# Altium PCB FPGA_Rack_v1_0.PcbDoc (part 5 of 5)
Units mil, origin at the board's own origin, x right, y up, seen from the top; angles counter-clockwise.
Board outline 6299.21 x 3937.01 mil, 8 copper layers (Top Layer, Top, Internal Plane 2, Vcc 3.3V, Internal Plane 1, Gnd, Mid-Layer 1, SIG1, Mid-Layer 2, SIG3, Mid-Layer 3, SIG2, Mid-Layer 4, SIG4, Bottom Layer, Bottom), stack 74.2 mil thick; 215 components, 379 nets, 1713 pads, 1076 vias.
Unrouted connection lines stored in the file: 1.
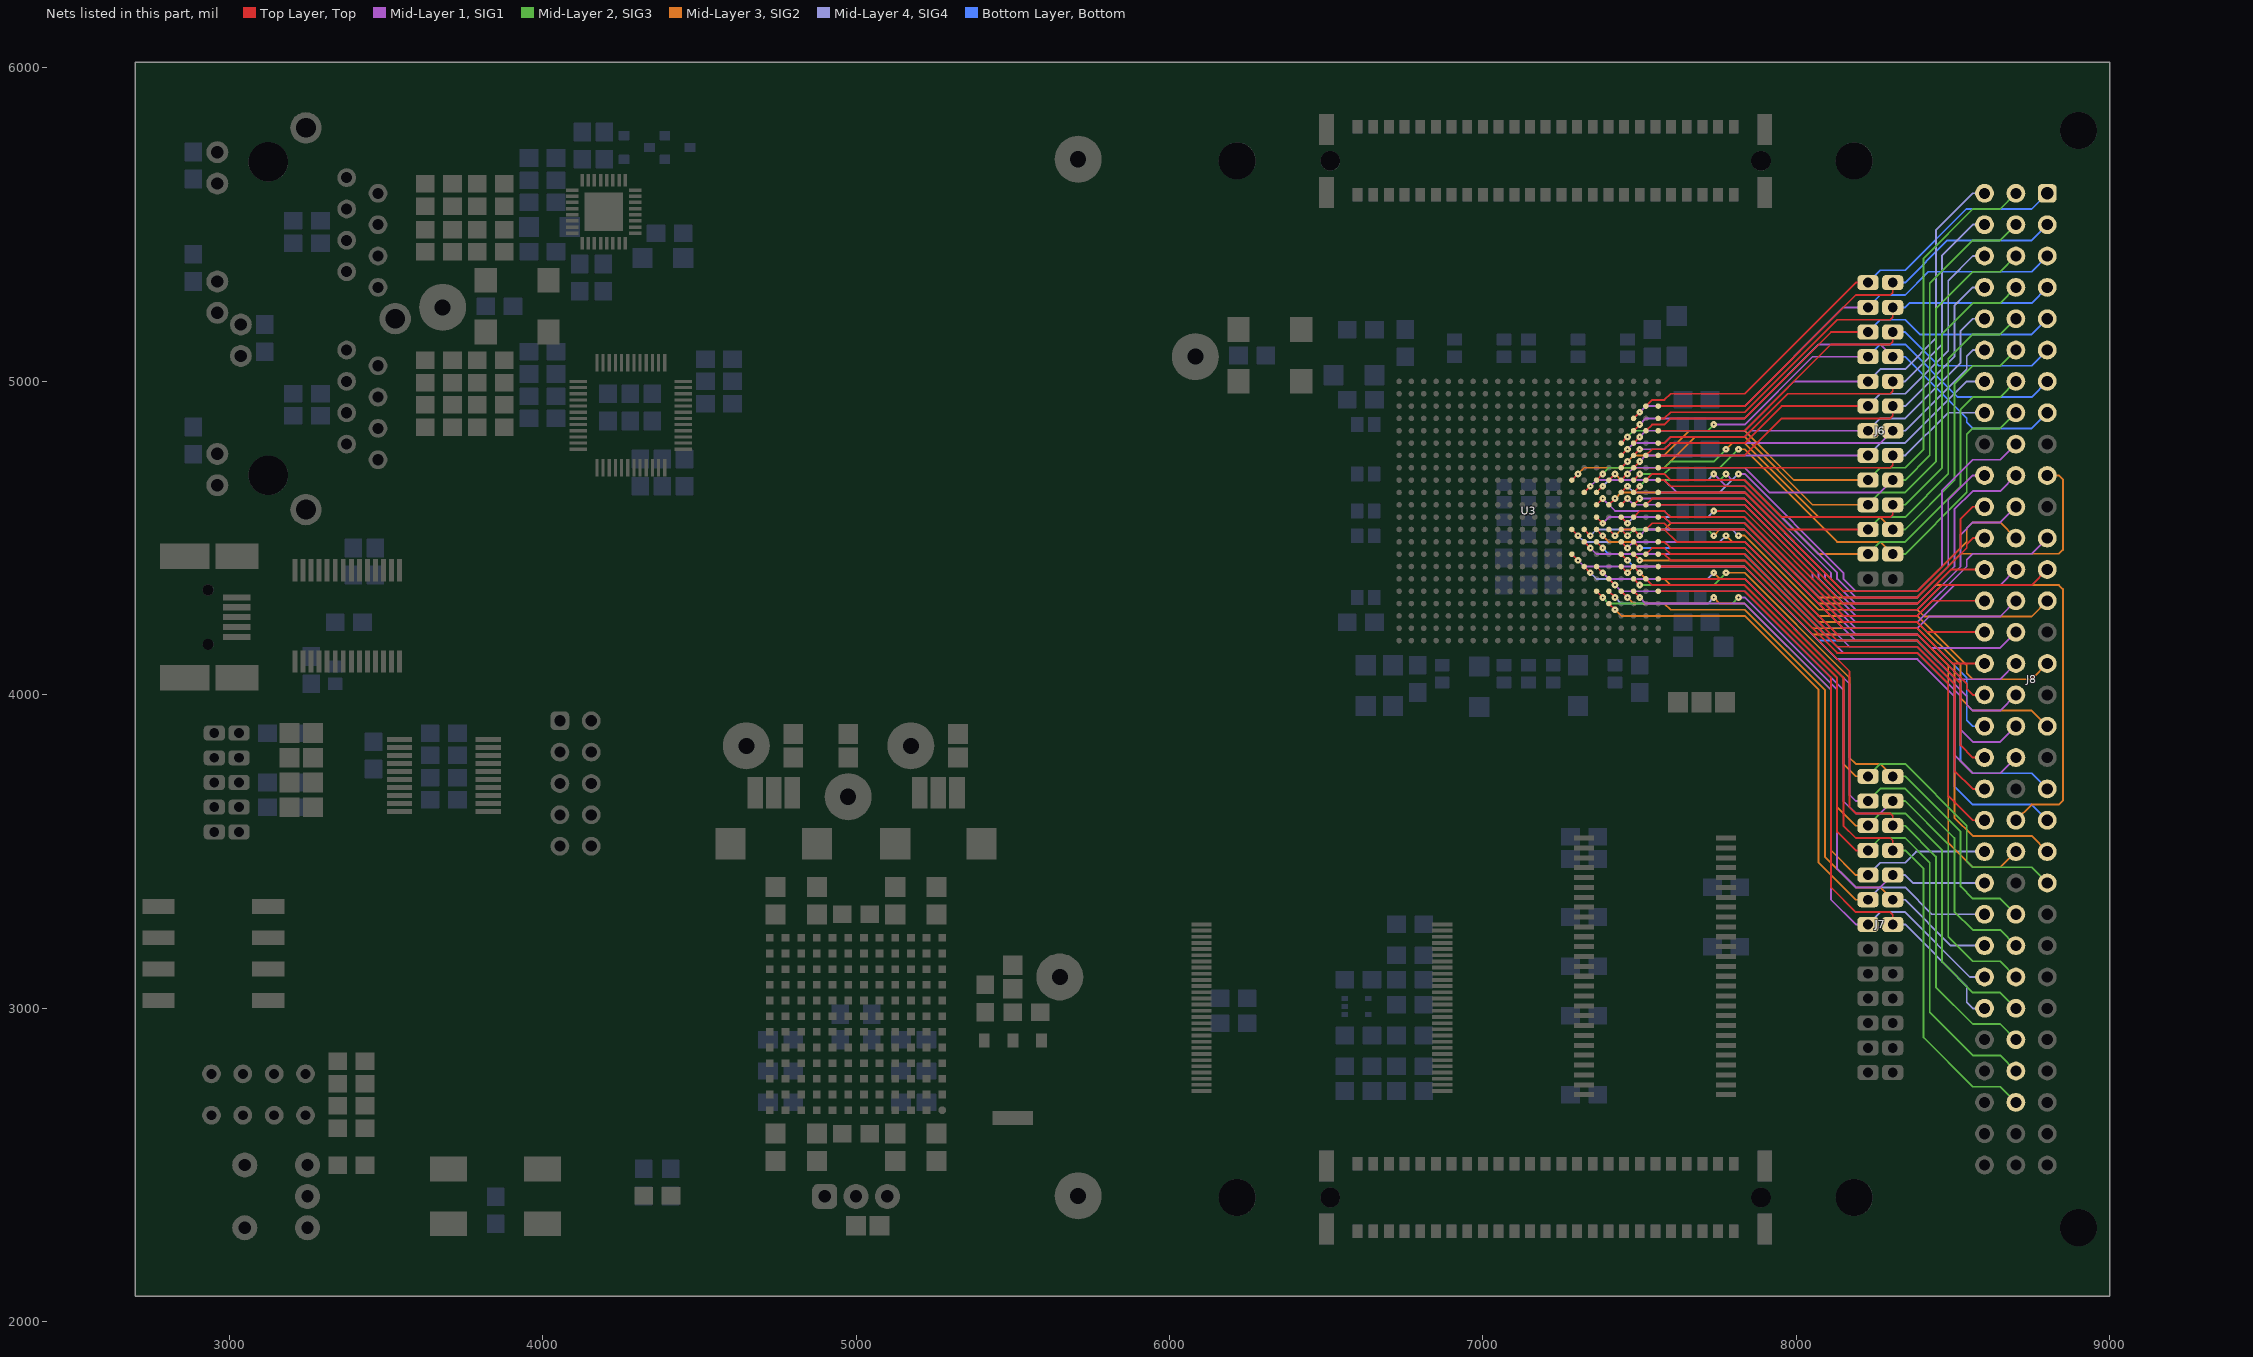
[diagram p11: the nets of this part, all layers, seen from the top]

## Via types
v1: diameter 21.65, hole 5.91, Top Layer, Top to Bottom Layer, Bottom, 1076 vias

## Nets (pads, with @x,y where several pads share a name; then routed paths per layer and width w, separated by ;. In a path a pad name is that pad's centre, name@x,y a point inside that pad or via, vN(x,y) a via of type N, cw(c..) or ccw(c..) an arc to the next point about the centre after c; other vN are vias at no path point) (continued)
VME_A11: J7.14 J8.27c U3.E1 | length 2032.9
  Top Layer, Top w5.91: U3.E1@7559.06,4330.71 7834.65,4330.71 8110.24,4055.12 8110.24,3385.83 8188.98,3307.09 8299.21,3307.09 8307.09,3299.21 J7.14@8307.09,3267.72
  Mid-Layer 4, SIG4 w5.91: J7.14@8307.09,3267.72 8346.46,3267.72 8543.31,3070.87 8543.31,3019.19 8562.5,3000 J8.27c@8600,3000
VME_A12: J7.13 J8.26c U3.E3 | length 2054.1
  Top Layer, Top w5.91: U3.E3@7480.31,4330.71 v1(7500,4311.02)
  Mid-Layer 1, SIG1 w5.91: v1(7500,4311.02) 7519.69,4291.34 7834.65,4291.34 8110.24,4015.75 8110.24,3346.46 8188.98,3267.72 J7.13@8228.35,3267.72
  Mid-Layer 4, SIG4 w5.91: J7.13@8228.35,3267.72 8267.72,3307.09 8346.46,3307.09 8553.54,3100 J8.26c@8600,3100
VME_A13: J7.12 J8.25c U3.E4 | length 1938.8
  Top Layer, Top w5.91: U3.E4@7440.94,4330.71 v1(7460.63,4311.02)
  Mid-Layer 3, SIG2 w5.91: v1(7460.63,4311.02) 7480.31,4291.34 7578.74,4291.34 7598.43,4271.65 7834.65,4271.65 8090.55,4015.75 8090.55,3484.25 8188.98,3385.83 8267.72,3385.83 J7.12@8307.09,3346.46
  Mid-Layer 4, SIG4 w5.91: J7.12@8307.09,3346.46 8346.46,3346.46 8492.91,3200 J8.25c@8600,3200
VME_A14: J7.11 J8.24c U3.D5 | length 1964.5
  Top Layer, Top w5.91: U3.D5@7401.57,4291.34 v1(7421.26,4271.65)
  Mid-Layer 3, SIG2 w5.91: v1(7421.26,4271.65) 7440.94,4251.97 7834.65,4251.97 8070.87,4015.75 8070.87,3464.57 8188.98,3346.46 J7.11@8228.35,3346.46
  Mid-Layer 4, SIG4 w5.91: J7.11@8228.35,3346.46 8267.72,3385.83 8346.46,3385.83 8432.28,3300 J8.24c@8600,3300
VME_A15: J7.10 J8.23c U3.E6 | length 2006.6
  Top Layer, Top w5.91: U3.E6@7362.2,4330.71 v1(7381.89,4311.02)
  Mid-Layer 1, SIG1 w5.91: v1(7814.96,4311.02) 7834.65,4311.02 8129.92,4015.75 8129.92,3444.88 8188.98,3385.83 8267.72,3385.83 J7.10@8307.09,3425.2
  Mid-Layer 2, SIG3 w5.91: v1(7381.89,4311.02) 7401.57,4291.34 7795.28,4291.34 v1(7814.96,4311.02)
  Mid-Layer 4, SIG4 w5.91: J7.10@8307.09,3425.2 8346.46,3425.2 8371.65,3400 J8.23c@8600,3400
VME_A16: J7.9 J8.22c U3.E5 | length 1920.6
  Top Layer, Top w5.91: U3.E5@7401.57,4330.71 v1(7421.26,4311.02)
  Mid-Layer 3, SIG2 w5.91: v1(7736.22,4311.02) 7755.91,4291.34 7834.65,4291.34 8110.24,4015.75 8110.24,3503.94 8188.98,3425.2 J7.9@8228.35,3425.2
  Mid-Layer 4, SIG4 w5.91: v1(7421.26,4311.02) 7440.94,4291.34 7716.54,4291.34 v1(7736.22,4311.02) ; J7.9@8228.35,3425.2 8267.72,3464.57 8346.46,3464.57 8381.89,3500 J8.22c@8600,3500
VME_A17: J8.21c U3.H1 | length 1601.8
  Top Layer, Top w5.91: U3.H1@7559.06,4448.82 7578.74,4448.82 7598.43,4429.13 7834.65,4429.13 8129.92,4133.86 8385.83,4133.86 8484.25,4035.43 8484.25,3678.25 8562.5,3600 J8.21c@8600,3600
VME_A18: J8.20c U3.H2 | length 1569
  Top Layer, Top w5.91: U3.H2@7519.69,4448.82 7539.37,4468.5 7578.74,4468.5 7598.43,4448.82 7834.65,4448.82 8129.92,4153.54 8385.83,4153.54 8503.94,4035.43 8503.94,3758.56 8562.5,3700 J8.20c@8600,3700
VME_A19: J8.19c U3.J1 | length 1441.1
  Top Layer, Top w5.91: U3.J1@7559.06,4488.19 7578.74,4488.19 7598.43,4468.5 7834.65,4468.5 8129.92,4173.23 8385.83,4173.23 8523.62,4035.43 8523.62,3838.88 8562.5,3800 J8.19c@8600,3800
VME_A20: J8.18c U3.J3 | length 1442.9
  Top Layer, Top w5.91: U3.J3@7480.31,4488.19 v1(7500,4468.5)
  Bottom Layer, Bottom w5.91: v1(7500,4468.5) 7834.65,4468.5 8090.55,4212.6 8385.83,4212.6 8543.31,4055.12 8543.31,3919.19 8562.5,3900 J8.18c@8600,3900
VME_A21: J8.17c U3.K1 | length 1269
  Top Layer, Top w5.91: U3.K1@7559.06,4527.56 7578.74,4527.56 7618.11,4488.19 7834.65,4488.19 8129.92,4192.91 8385.83,4192.91 8543.31,4035.43 8543.31,4019.19 8562.5,4000 J8.17c@8600,4000
VME_A22: J8.16c U3.K2 | length 1273.7
  Top Layer, Top w5.91: U3.K2@7519.69,4527.56 7539.37,4547.24 7578.74,4547.24 7598.43,4527.56 7834.65,4527.56 8149.61,4212.6 8385.83,4212.6 8498.43,4100 J8.16c@8600,4100
VME_A23: J8.15c U3.L1 | length 1192.9
  Top Layer, Top w5.91: U3.L1@7559.06,4566.93 7578.74,4566.93 7598.43,4547.24 7834.65,4547.24 8149.61,4232.28 8385.83,4232.28 8418.11,4200 J8.15c@8600,4200
VME_ACFAIL_N: J6.19 J8.3b U3.P8 | length 2178.1
  Top Layer, Top w5.91: U3.P8@7283.46,4685.04 v1(7303.15,4704.72)
  Mid-Layer 2, SIG3 w5.91: J6.19@8228.35,4606.3 8267.72,4645.67 8346.46,4645.67 8444.88,4744.09 8444.88,5232.38 8562.5,5350 8650,5350 J8.3b@8700,5400
  Mid-Layer 3, SIG2 w5.91: v1(7303.15,4704.72) 7322.83,4724.41 7578.74,4724.41 7677.17,4822.83 7834.65,4822.83 8051.18,4606.3 J6.19@8228.35,4606.3
VME_AM0: J8.16b U3.K3 | length 1454.5
  Top Layer, Top w5.91: U3.K3@7480.31,4527.56 v1(7500,4507.87)
  Mid-Layer 1, SIG1 w5.91: v1(7500,4507.87) 7519.69,4527.56 7834.65,4527.56 8188.98,4173.23 8385.83,4173.23 8509.06,4050 8650,4050 J8.16b@8700,4100
VME_AM1: J8.17b U3.J4 | length 1534.7
  Top Layer, Top w5.91: U3.J4@7440.94,4488.19 v1(7460.63,4468.5)
  Mid-Layer 1, SIG1 w5.91: v1(7460.63,4468.5) 7480.31,4488.19 7834.65,4488.19 8169.29,4153.54 8385.83,4153.54 8543.31,3996.06 8543.31,3969.19 8562.5,3950 8650,3950 J8.17b@8700,4000
VME_AM2: J8.18b U3.J7 | length 1725
  Top Layer, Top w5.91: U3.J7@7322.83,4488.19 v1(7342.52,4468.5)
  Mid-Layer 1, SIG1 w5.91: v1(7342.52,4468.5) 7362.2,4448.82 7834.65,4448.82 8149.61,4133.86 8385.83,4133.86 8523.62,3996.06 8523.62,3888.88 8562.5,3850 8650,3850 J8.18b@8700,3900
VME_AM3: J8.19b U3.H8 | length 1836.5
  Top Layer, Top w5.91: U3.H8@7283.46,4448.82 v1(7303.15,4429.13)
  Mid-Layer 1, SIG1 w5.91: v1(7303.15,4429.13) 7322.83,4409.45 7834.65,4409.45 8129.92,4114.17 8385.83,4114.17 8503.94,3996.06 8503.94,3808.56 8562.5,3750 8650,3750 J8.19b@8700,3800
VME_AM4: J7.1 J8.23a U3.G7 | length 2172.1
  Top Layer, Top w5.91: U3.G7@7322.83,4409.45 v1(7342.52,4389.76)
  Mid-Layer 2, SIG3 w5.91: J7.1@8228.35,3740.16 8267.72,3779.53 8346.46,3779.53 8543.31,3582.68 8543.31,3469.19 8562.5,3450 8750,3450 J8.23a@8800,3400
  Mid-Layer 3, SIG2 w5.91: v1(7736.22,4389.76) 7755.91,4370.08 7834.65,4370.08 8149.61,4055.12 8149.61,3779.53 8188.98,3740.16 J7.1@8228.35,3740.16
  Mid-Layer 4, SIG4 w5.91: v1(7342.52,4389.76) 7362.2,4370.08 7716.54,4370.08 v1(7736.22,4389.76)
VME_AM5: J8.14c U3.L3 | length 1286.3
  Top Layer, Top w5.91: U3.L3@7480.31,4566.93 7500,4586.61 7578.74,4586.61 7598.43,4566.93 7834.65,4566.93 8149.61,4251.97 8385.83,4251.97 8433.86,4300 J8.14c@8600,4300
VME_AS_N: J8.18a U3.K6 | length 1759.6
  Top Layer, Top w5.91: U3.K6@7362.2,4527.56 v1(7381.89,4507.87)
  Mid-Layer 3, SIG2 w5.91: v1(7381.89,4507.87) 7401.57,4488.19 7578.74,4488.19 7598.43,4468.5 7834.65,4468.5 8070.87,4232.28 8385.83,4232.28 8523.62,4094.49 8523.62,3988.88 8562.5,3950 8750,3950 J8.18a@8800,3900
VME_BBSY_N: J6.17 J8.1b U3.R4 | length 2109.3
  Top Layer, Top w5.91: U3.R4@7440.94,4724.41 v1(7460.63,4744.09)
  Mid-Layer 2, SIG3 w5.91: J6.17@8228.35,4685.04 8267.72,4724.41 8346.46,4724.41 8405.51,4783.46 8405.51,5393.01 8562.5,5550 8650,5550 J8.1b@8700,5600
  Mid-Layer 3, SIG2 w5.91: v1(7460.63,4744.09) 7480.31,4763.78 7578.74,4763.78 7657.48,4842.52 7834.65,4842.52 7992.13,4685.04 J6.17@8228.35,4685.04
VME_BCLR_N: J6.18 J8.2b U3.P4 | length 1983.4
  Top Layer, Top w5.91: U3.P4@7440.94,4685.04 v1(7460.63,4704.72)
  Mid-Layer 1, SIG1 w5.91: v1(7460.63,4704.72) 7480.31,4724.41 7834.65,4724.41 7913.39,4645.67 8267.72,4645.67 J6.18@8307.09,4685.04
  Mid-Layer 2, SIG3 w5.91: J6.18@8307.09,4685.04 8346.46,4685.04 8425.2,4763.78 8425.2,5312.7 8562.5,5450 8650,5450 J8.2b@8700,5500
VME_BERR_N: J8.11c U3.N1 | length 1337.2
  Top Layer, Top w5.91: U3.N1@7559.06,4645.67 7834.65,4645.67 8149.61,4330.71 8385.83,4330.71 8523.62,4468.5 8523.62,4561.12 8562.5,4600 J8.11c@8600,4600
VME_BG0IN_N: J6.20 J8.4b U3.P2 | length 1818.2
  Top Layer, Top w5.91: U3.P2@7519.69,4685.04 7539.37,4704.72 7578.74,4704.72 7598.43,4685.04 7834.65,4685.04 7952.76,4566.93 8299.21,4566.93 8307.09,4574.8 J6.20@8307.09,4606.3
  Mid-Layer 2, SIG3 w5.91: J6.20@8307.09,4606.3 8346.46,4606.3 8464.57,4724.41 8464.57,5152.07 8562.5,5250 8650,5250 J8.4b@8700,5300
VME_BG0OUT_N: J6.21 J8.5b U3.P1 | length 1699.7
  Top Layer, Top w5.91: U3.P1@7559.06,4685.04 7578.74,4685.04 7598.43,4665.35 7834.65,4665.35 7972.44,4527.56 J6.21@8228.35,4527.56
  Mid-Layer 2, SIG3 w5.91: J6.21@8228.35,4527.56 8267.72,4566.93 8346.46,4566.93 8484.25,4704.72 8484.25,5071.75 8562.5,5150 8650,5150 J8.5b@8700,5200
VME_BG1IN_N: J6.22 J8.6b U3.P6 | length 1917.5
  Top Layer, Top w5.91: U3.P6@7362.2,4685.04 v1(7381.89,4704.72)
  Mid-Layer 2, SIG3 w5.91: v1(7381.89,4704.72) 7401.57,4724.41 7578.74,4724.41 7598.43,4744.09 7736.22,4744.09 v1(7775.59,4783.46) ; J6.22@8307.09,4527.56 8346.46,4527.56 8503.94,4685.04 8503.94,4991.44 8562.5,5050 8650,5050 J8.6b@8700,5100
  Mid-Layer 3, SIG2 w5.91: v1(7775.59,4783.46) 7795.28,4803.15 7834.65,4803.15 8070.87,4566.93 8267.72,4566.93 J6.22@8307.09,4527.56
VME_BG1OUT_N: J6.23 J8.7b U3.P5 | length 1784.9
  Top Layer, Top w5.91: U3.P5@7401.57,4685.04 v1(7421.26,4704.72)
  Mid-Layer 2, SIG3 w5.91: J6.23@8228.35,4448.82 8267.72,4488.19 8346.46,4488.19 8523.62,4665.35 8523.62,4911.12 8562.5,4950 8650,4950 J8.7b@8700,5000
  Mid-Layer 3, SIG2 w5.91: v1(7421.26,4704.72) 7440.94,4685.04 7834.65,4685.04 8070.87,4448.82 J6.23@8228.35,4448.82
VME_BG2IN_N: J6.24 J8.8b U3.P3 | length 1694.4
  Top Layer, Top w5.91: U3.P3@7480.31,4685.04 v1(7500,4704.72)
  Mid-Layer 2, SIG3 w5.91: v1(7500,4704.72) 7578.74,4704.72 7598.43,4724.41 7755.91,4724.41 v1(7814.96,4783.46) ; J6.24@8307.09,4448.82 8346.46,4448.82 8543.31,4645.67 8543.31,4830.81 8562.5,4850 8650,4850 J8.8b@8700,4900
  Mid-Layer 3, SIG2 w5.91: v1(7814.96,4783.46) 7834.65,4783.46 8129.92,4488.19 8267.72,4488.19 J6.24@8307.09,4448.82
VME_BG2OUT_N: J8.9b U3.N4 | length 1802.8
  Top Layer, Top w5.91: U3.N4@7440.94,4645.67 v1(7460.63,4665.35)
  Mid-Layer 1, SIG1 w5.91: v1(7814.96,4704.72) 7834.65,4704.72 8149.61,4389.76 8149.61,4370.08 8188.98,4330.71 8385.83,4330.71 8464.57,4409.45 8464.57,4652.07 8562.5,4750 8650,4750 J8.9b@8700,4800
  Mid-Layer 4, SIG4 w5.91: v1(7460.63,4665.35) 7480.31,4645.67 7755.91,4645.67 v1(7814.96,4704.72)
VME_BG3IN_N: J8.10b U3.N6 | length 1820.9
  Top Layer, Top w5.91: U3.N6@7362.2,4645.67 v1(7381.89,4665.35)
  Mid-Layer 1, SIG1 w5.91: v1(7736.22,4704.72) 7775.59,4665.35 7834.65,4665.35 8110.24,4389.76 8110.24,4370.08 8188.98,4291.34 8385.83,4291.34 8503.94,4409.45 8503.94,4591.44 8562.5,4650 8650,4650 J8.10b@8700,4700
  Mid-Layer 4, SIG4 w5.91: v1(7381.89,4665.35) 7401.57,4685.04 7716.54,4685.04 v1(7736.22,4704.72)
VME_BG3OUT_N: J8.11b U3.N7 | length 1771.8
  Top Layer, Top w5.91: U3.N7@7322.83,4645.67 v1(7342.52,4665.35)
  Mid-Layer 1, SIG1 w5.91: v1(7342.52,4665.35) 7362.2,4685.04 7578.74,4685.04 7618.11,4645.67 7834.65,4645.67 8090.55,4389.76 8090.55,4370.08 8188.98,4271.65 8385.83,4271.65 8523.62,4409.45 8523.62,4511.12 8562.5,4550 8650,4550 J8.11b@8700,4600
VME_BR0_N: J8.12b U3.M5 | length 1581.7
  Top Layer, Top w5.91: U3.M5@7401.57,4606.3 v1(7421.26,4625.98)
  Mid-Layer 3, SIG2 w5.91: v1(7421.26,4625.98) 7440.94,4645.67 7834.65,4645.67 8149.61,4330.71 8385.83,4330.71 8543.31,4488.19 8543.31,4530.81 8562.5,4550 8650,4550 J8.12b@8700,4500
VME_BR1_N: J8.13b U3.M4 | length 1511.3
  Top Layer, Top w5.91: U3.M4@7440.94,4606.3 v1(7460.63,4625.98)
  Mid-Layer 1, SIG1 w5.91: v1(7460.63,4625.98) 7480.31,4606.3 7834.65,4606.3 8051.18,4389.76 8051.18,4370.08 8188.98,4232.28 8385.83,4232.28 8503.54,4350 8650,4350 J8.13b@8700,4400
VME_BR2_N: J8.14b U3.M6 | length 1553.4
  Top Layer, Top w5.91: U3.M6@7362.2,4606.3 v1(7381.89,4625.98)
  Mid-Layer 1, SIG1 w5.91: v1(7381.89,4625.98) 7421.26,4586.61 7578.74,4586.61 7598.43,4566.93 7834.65,4566.93 8188.98,4212.6 8385.83,4212.6 8423.23,4250 8650,4250 J8.14b@8700,4300
VME_BR3_N: J8.15b U3.L6 | length 1547.5
  Top Layer, Top w5.91: U3.L6@7362.2,4566.93 v1(7381.89,4547.24)
  Mid-Layer 1, SIG1 w5.91: v1(7381.89,4547.24) 7401.57,4566.93 7578.74,4566.93 7598.43,4547.24 7834.65,4547.24 8188.98,4192.91 8385.83,4192.91 8428.74,4150 8650,4150 J8.15b@8700,4200
VME_D00: J6.1 J8.1a U3.Y2 | length 1561.5
  Top Layer, Top w5.91: U3.Y2@7519.69,4921.26 7539.37,4940.94 7578.74,4940.94 7598.43,4960.63 7834.65,4960.63 8188.98,5314.96 J6.1@8228.35,5314.96
  Bottom Layer, Bottom w5.91: J6.1@8228.35,5314.96 8267.72,5354.33 8346.46,5354.33 8542.13,5550 8750,5550 J8.1a@8800,5600
VME_D01: J6.2 J8.2a U3.Y1 | length 1499.1
  Top Layer, Top w5.91: U3.Y1@7559.06,4921.26 7834.65,4921.26 8188.98,5275.59 8299.21,5275.59 8307.09,5283.46 J6.2@8307.09,5314.96
  Bottom Layer, Bottom w5.91: J6.2@8307.09,5314.96 8346.46,5314.96 8481.5,5450 8750,5450 J8.2a@8800,5500
VME_D02: J6.3 J8.3a U3.W3 | length 1534.3
  Top Layer, Top w5.91: U3.W3@7480.31,4881.89 v1(7500,4901.57)
  Mid-Layer 1, SIG1 w5.91: v1(7500,4901.57) 7519.69,4921.26 7834.65,4921.26 8149.61,5236.22 J6.3@8228.35,5236.22
  Bottom Layer, Bottom w5.91: J6.3@8228.35,5236.22 8267.72,5275.59 8346.46,5275.59 8420.87,5350 8750,5350 J8.3a@8800,5400
VME_D03: J6.4 J8.4a U3.W1 | length 1432.6
  Top Layer, Top w5.91: U3.W1@7559.06,4881.89 7578.74,4881.89 7598.43,4901.57 7834.65,4901.57 8129.92,5196.85 8299.21,5196.85 8307.09,5204.72 J6.4@8307.09,5236.22
  Bottom Layer, Bottom w5.91: J6.4@8307.09,5236.22 8346.46,5236.22 8360.24,5250 8750,5250 J8.4a@8800,5300
VME_D04: J6.5 J8.5a U3.V2 | length 1467.2
  Top Layer, Top w5.91: U3.V2@7519.69,4842.52 7539.37,4862.2 7578.74,4862.2 7598.43,4881.89 7834.65,4881.89 8110.24,5157.48 J6.5@8228.35,5157.48
  Bottom Layer, Bottom w5.91: J6.5@8228.35,5157.48 8267.72,5196.85 8346.46,5196.85 8393.31,5150 8750,5150 J8.5a@8800,5200
VME_D05: J6.6 J8.6a U3.V1 | length 1455.1
  Top Layer, Top w5.91: U3.V1@7559.06,4842.52 7834.65,4842.52 8110.24,5118.11 8299.21,5118.11 8307.09,5125.98 J6.6@8307.09,5157.48
  Bottom Layer, Bottom w5.91: J6.6@8307.09,5157.48 8346.46,5157.48 8453.94,5050 8750,5050 J8.6a@8800,5100
VME_D06: J6.7 J8.7a U3.U4 | length 1579.9
  Top Layer, Top w5.91: U3.U4@7440.94,4803.15 v1(7460.63,4822.83)
  Mid-Layer 1, SIG1 w5.91: v1(7736.22,4862.2) 7834.65,4862.2 8051.18,5078.74 J6.7@8228.35,5078.74
  Mid-Layer 2, SIG3 w5.91: v1(7460.63,4822.83) 7480.31,4842.52 7716.54,4842.52 v1(7736.22,4862.2)
  Bottom Layer, Bottom w5.91: J6.7@8228.35,5078.74 8267.72,5118.11 8346.46,5118.11 8514.57,4950 8750,4950 J8.7a@8800,5000
VME_D07: J6.8 J8.8a U3.V3 | length 1573
  Top Layer, Top w5.91: U3.V3@7480.31,4842.52 v1(7500,4862.2)
  Mid-Layer 1, SIG1 w5.91: v1(7500,4862.2) 7519.69,4881.89 7834.65,4881.89 8070.87,5118.11 8267.72,5118.11 J6.8@8307.09,5078.74
  Bottom Layer, Bottom w5.91: J6.8@8307.09,5078.74 8346.46,5078.74 8543.31,4881.89 8543.31,4869.19 8562.5,4850 8750,4850 J8.8a@8800,4900
VME_D08: J6.9 J8.1c U3.U3 | length 1651.6
  Top Layer, Top w5.91: U3.U3@7480.31,4803.15 v1(7500,4822.83)
  Mid-Layer 1, SIG1 w5.91: v1(7500,4822.83) 7519.69,4842.52 7834.65,4842.52 7992.13,5000 J6.9@8228.35,5000
  Mid-Layer 4, SIG4 w5.91: J6.9@8228.35,5000 8267.72,5039.37 8346.46,5039.37 8444.88,5137.8 8444.88,5482.38 8562.5,5600 J8.1c@8600,5600
VME_D09: J6.10 J8.2c U3.U1 | length 1514.4
  Top Layer, Top w5.91: U3.U1@7559.06,4803.15 7578.74,4803.15 7598.43,4822.83 7834.65,4822.83 7972.44,4960.63 8299.21,4960.63 8307.09,4968.5 J6.10@8307.09,5000
  Mid-Layer 4, SIG4 w5.91: J6.10@8307.09,5000 8346.46,5000 8464.57,5118.11 8464.57,5402.07 8562.5,5500 J8.2c@8600,5500
VME_D10: J6.11 J8.3c U3.T2 | length 1474.7
  Top Layer, Top w5.91: U3.T2@7519.69,4763.78 7539.37,4783.46 7578.74,4783.46 7598.43,4803.15 7834.65,4803.15 7952.76,4921.26 J6.11@8228.35,4921.26
  Mid-Layer 4, SIG4 w5.91: J6.11@8228.35,4921.26 8267.72,4960.63 8346.46,4960.63 8484.25,5098.43 8484.25,5321.75 8562.5,5400 J8.3c@8600,5400
VME_D11: J6.12 J8.4c U3.T1 | length 1376.8
  Top Layer, Top w5.91: U3.T1@7559.06,4763.78 7834.65,4763.78 7952.76,4881.89 8299.21,4881.89 8307.09,4889.76 J6.12@8307.09,4921.26
  Mid-Layer 4, SIG4 w5.91: J6.12@8307.09,4921.26 8346.46,4921.26 8503.94,5078.74 8503.94,5241.44 8562.5,5300 J8.4c@8600,5300
VME_D12: J6.13 J8.5c U3.T4 | length 1399.5
  Top Layer, Top w5.91: U3.T4@7440.94,4763.78 v1(7460.63,4783.46)
  Mid-Layer 1, SIG1 w5.91: v1(7460.63,4783.46) 7480.31,4803.15 7578.74,4803.15 7598.43,4822.83 7834.65,4822.83 7854.33,4842.52 J6.13@8228.35,4842.52
  Mid-Layer 4, SIG4 w5.91: J6.13@8228.35,4842.52 8267.72,4881.89 8346.46,4881.89 8523.62,5059.06 8523.62,5161.12 8562.5,5200 J8.5c@8600,5200
VME_D13: J6.14 J8.6c U3.T3 | length 1283.2
  Top Layer, Top w5.91: U3.T3@7480.31,4763.78 v1(7500,4783.46)
  Mid-Layer 1, SIG1 w5.91: v1(7500,4783.46) 7578.74,4783.46 7598.43,4803.15 8267.72,4803.15 J6.14@8307.09,4842.52
  Mid-Layer 4, SIG4 w5.91: J6.14@8307.09,4842.52 8346.46,4842.52 8543.31,5039.37 8543.31,5080.81 8562.5,5100 J8.6c@8600,5100
VME_D14: J6.15 J8.7c U3.R3 | length 1233.8
  Top Layer, Top w5.91: U3.R3@7480.31,4724.41 v1(7500,4744.09)
  Mid-Layer 1, SIG1 w5.91: v1(7500,4744.09) 7519.69,4763.78 J6.15@8228.35,4763.78
  Mid-Layer 4, SIG4 w5.91: J6.15@8228.35,4763.78 8267.72,4803.15 8345.96,4803.15 8542.82,5000 J8.7c@8600,5000
VME_D15: J6.16 J8.8c U3.R1 | length 1132.1
  Top Layer, Top w5.91: U3.R1@7559.06,4724.41 8299.21,4724.41 8307.09,4732.28 J6.16@8307.09,4763.78
  Mid-Layer 4, SIG4 w5.91: J6.16@8307.09,4763.78 8347.54,4763.78 8483.76,4900 J8.8c@8600,4900
VME_DS0: J8.13a U3.L4 | length 1567.1
  Top Layer, Top w5.91: U3.L4@7440.94,4566.93 v1(7460.63,4547.24) ; v1(7736.22,4586.61) 7834.65,4586.61 8149.61,4271.65 8385.83,4271.65 8464.17,4350 8750,4350 J8.13a@8800,4400
  Mid-Layer 4, SIG4 w5.91: v1(7460.63,4547.24) 7480.31,4566.93 7716.54,4566.93 v1(7736.22,4586.61)
VME_DS1: J8.12a U3.M3 | length 1609.5
  Top Layer, Top w5.91: U3.M3@7480.31,4606.3 v1(7500,4625.98)
  Mid-Layer 1, SIG1 w5.91: v1(7500,4625.98) 7834.65,4625.98 8070.87,4389.76 8070.87,4370.08 8188.98,4251.97 8385.83,4251.97 8543.31,4409.45 8543.31,4430.81 8562.5,4450 8750,4450 J8.12a@8800,4500
VME_DTACK_N: J8.16a U3.K8 | length 1766.2
  Top Layer, Top w5.91: U3.K8@7283.46,4527.56 v1(7303.15,4507.87)
  Mid-Layer 3, SIG2 w5.91: v1(7775.59,4507.87) 7795.28,4488.19 7834.65,4488.19 8070.87,4251.97 8385.83,4251.97 8543.31,4094.49 8543.31,4069.19 8562.5,4050 8750,4050 J8.16a@8800,4100
  Mid-Layer 4, SIG4 w5.91: v1(7303.15,4507.87) 7322.83,4488.19 7755.91,4488.19 v1(7775.59,4507.87)
VME_IACK_N: J8.20a U3.J6 | length 1920.2
  Top Layer, Top w5.91: U3.J6@7362.2,4488.19 v1(7381.89,4468.5)
  Bottom Layer, Bottom w5.91: v1(7381.89,4468.5) 7401.57,4448.82 7834.65,4448.82 8090.55,4192.91 8385.83,4192.91 8523.62,4055.12 8523.62,3788.88 8562.5,3750 8750,3750 J8.20a@8800,3700
VME_IACKIN_N: J8.21a U3.H4 | length 1913.7
  Top Layer, Top w5.91: U3.H4@7440.94,4448.82 v1(7460.63,4429.13)
  Bottom Layer, Bottom w5.91: v1(7460.63,4429.13) 7480.31,4409.45 7834.65,4409.45 8070.87,4173.23 8385.83,4173.23 8503.94,4055.12 8503.94,3708.56 8562.5,3650 8750,3650 J8.21a@8800,3600
VME_IACKOUT_N: J8.22a U3.H3 | length 1997.3
  Top Layer, Top w5.91: U3.H3@7480.31,4448.82 v1(7500,4429.13)
  Mid-Layer 3, SIG2 w5.91: v1(7500,4429.13) 7834.65,4429.13 8051.18,4212.6 8385.83,4212.6 8503.94,4094.49 8503.94,3608.56 8562.5,3550 8750,3550 J8.22a@8800,3500
VME_IRQ1_N: J7.8 J8.30b U3.F1 | length 2443
  Top Layer, Top w5.91: U3.F1@7559.06,4370.08 7834.65,4370.08 8149.61,4055.12 8149.61,3582.68 8188.98,3543.31 8299.21,3543.31 8307.09,3535.43 J7.8@8307.09,3503.94
  Mid-Layer 2, SIG3 w5.91: J7.8@8307.09,3503.94 8346.46,3503.94 8405.51,3444.88 8405.51,2906.99 8562.5,2750 8650,2750 J8.30b@8700,2700
VME_IRQ2_N: J7.7 J8.29b U3.F2 | length 2431.1
  Top Layer, Top w5.91: U3.F2@7519.69,4370.08 7539.37,4350.39 7834.65,4350.39 8129.92,4055.12 8129.92,3562.99 8188.98,3503.94 J7.7@8228.35,3503.94
  Mid-Layer 2, SIG3 w5.91: J7.7@8228.35,3503.94 8267.72,3543.31 8346.46,3543.31 8425.2,3464.57 8425.2,2987.3 8562.5,2850 8650,2850 J8.29b@8700,2800
VME_IRQ3_N: J7.6 J8.28b U3.G1 | length 2282.4
  Top Layer, Top w5.91: U3.G1@7559.06,4409.45 7834.65,4409.45 8169.29,4074.8 8169.29,3641.73 8188.98,3622.05 8299.21,3622.05 8307.09,3614.17 J7.6@8307.09,3582.68
  Mid-Layer 2, SIG3 w5.91: J7.6@8307.09,3582.68 8346.46,3582.68 8444.88,3484.25 8444.88,3067.62 8562.5,2950 8650,2950 J8.28b@8700,2900
VME_IRQ4_N: J7.5 J8.27b U3.G3 | length 2286.8
  Top Layer, Top w5.91: U3.G3@7480.31,4409.45 v1(7500,4389.76)
  Mid-Layer 2, SIG3 w5.91: J7.5@8228.35,3582.68 8267.72,3622.05 8346.46,3622.05 8464.57,3503.94 8464.57,3147.93 8562.5,3050 8650,3050 J8.27b@8700,3000
  Mid-Layer 3, SIG2 w5.91: v1(7500,4389.76) 7519.69,4370.08 7578.74,4370.08 7598.43,4350.39 7834.65,4350.39 8129.92,4055.12 8129.92,3641.73 8188.98,3582.68 J7.5@8228.35,3582.68
VME_IRQ5_N: J7.4 J8.26b U3.F5 | length 2237.7
  Top Layer, Top w5.91: U3.F5@7401.57,4370.08 v1(7421.26,4350.39)
  Mid-Layer 1, SIG1 w5.91: v1(7421.26,4350.39) 7440.94,4330.71 7834.65,4330.71 8149.61,4015.75 8149.61,3661.42 8188.98,3622.05 8267.72,3622.05 J7.4@8307.09,3661.42
  Mid-Layer 2, SIG3 w5.91: J7.4@8307.09,3661.42 8346.46,3661.42 8484.25,3523.62 8484.25,3228.25 8562.5,3150 8650,3150 J8.26b@8700,3100
VME_IRQ6_N: J7.3 J8.25b U3.G6 | length 2216.5
  Top Layer, Top w5.91: U3.G6@7362.2,4409.45 v1(7381.89,4389.76)
  Mid-Layer 1, SIG1 w5.91: v1(7381.89,4389.76) 7401.57,4370.08 7834.65,4370.08 8169.29,4035.43 8169.29,3681.1 8188.98,3661.42 J7.3@8228.35,3661.42
  Mid-Layer 2, SIG3 w5.91: J7.3@8228.35,3661.42 8267.72,3700.79 8346.46,3700.79 8503.94,3543.31 8503.94,3308.56 8562.5,3250 8650,3250 J8.25b@8700,3200
VME_IRQ7_N: J7.2 J8.24b U3.F3 | length 1947.4
  Top Layer, Top w5.91: U3.F3@7480.31,4370.08 v1(7500,4350.39)
  Mid-Layer 2, SIG3 w5.91: v1(7500,4350.39) 7736.22,4350.39 v1(7775.59,4389.76) ; J7.2@8307.09,3740.16 8346.46,3740.16 8523.62,3562.99 8523.62,3388.88 8562.5,3350 8650,3350 J8.24b@8700,3300
  Mid-Layer 3, SIG2 w5.91: v1(7775.59,4389.76) 7834.65,4389.76 8169.29,4055.12 8169.29,3799.21 8188.98,3779.53 8267.72,3779.53 J7.2@8307.09,3740.16
VME_LWORD_N: J8.13c U3.M1 | length 1216.4
  Top Layer, Top w5.91: U3.M1@7559.06,4606.3 7834.65,4606.3 8149.61,4291.34 8385.83,4291.34 8494.49,4400 J8.13c@8600,4400
VME_SERCLK: J8.21b U3.K4 | length 2419.9
  Top Layer, Top w5.91: U3.K4@7440.94,4527.56 v1(7460.63,4507.87)
  Mid-Layer 2, SIG3 w5.91: v1(7460.63,4507.87) 7480.31,4527.56 7716.54,4527.56 v1(7736.22,4507.87)
  Mid-Layer 3, SIG2 w5.91: v1(7736.22,4507.87) 7755.91,4527.56 7834.65,4527.56 8070.87,4291.34 8385.83,4291.34 8444.49,4350 8837.5,4350 8850,4337.5 8850,3662.5 8837.5,3650 8750,3650 J8.21b@8700,3600
VME_SERDAT: J8.22b U3.G4 | length 2025.2
  Top Layer, Top w5.91: U3.G4@7440.94,4409.45 v1(7460.63,4389.76)
  Mid-Layer 3, SIG2 w5.91: v1(7460.63,4389.76) 7480.31,4409.45 7834.65,4409.45 8051.18,4192.91 8385.83,4192.91 8484.25,4094.49 8484.25,3528.25 8562.5,3450 8650,3450 J8.22b@8700,3500
VME_SYSCLK: J8.10a U3.K5 | length 1913.7
  Top Layer, Top w5.91: U3.K5@7401.57,4527.56 v1(7421.26,4507.87)
  Mid-Layer 3, SIG2 w5.91: v1(7421.26,4507.87) 7440.94,4527.56 7578.74,4527.56 7598.43,4547.24 7834.65,4547.24 8070.87,4311.02 8385.83,4311.02 8524.8,4450 8837.5,4450 8850,4462.5 8850,4687.5 8837.5,4700 J8.10a@8800,4700
VME_SYSFAIL_N: J8.10c U3.N3 | length 1604.2
  Top Layer, Top w5.91: U3.N3@7480.31,4645.67 v1(7500,4665.35)
  Mid-Layer 1, SIG1 w5.91: v1(7775.59,4704.72) 7795.28,4685.04 7834.65,4685.04 8129.92,4389.76 8129.92,4370.08 8188.98,4311.02 8385.83,4311.02 8484.25,4409.45 8484.25,4621.75 8562.5,4700 J8.10c@8600,4700
  Mid-Layer 2, SIG3 w5.91: v1(7500,4665.35) 7519.69,4685.04 7755.91,4685.04 v1(7775.59,4704.72)
VME_SYSRESET_N: J8.12c U3.M2 | length 1304.4
  Top Layer, Top w5.91: U3.M2@7519.69,4606.3 7539.37,4625.98 7834.65,4625.98 8149.61,4311.02 8385.83,4311.02 8543.31,4468.5 8543.31,4480.81 8562.5,4500 J8.12c@8600,4500
VME_WRITE_N: J8.14a U3.K7 | length 1629.2
  Top Layer, Top w5.91: U3.K7@7322.83,4527.56 v1(7342.52,4507.87)
  Mid-Layer 3, SIG2 w5.91: v1(7814.96,4507.87) 7834.65,4507.87 8070.87,4271.65 8385.83,4271.65 8407.48,4250 8750,4250 J8.14a@8800,4300
  Mid-Layer 4, SIG4 w5.91: v1(7342.52,4507.87) 7362.2,4527.56 7795.28,4527.56 v1(7814.96,4507.87)
pads on no net: 1.1 2.1 3.1 4.1 D1.2 D2.2 J2.51 J2.52 J2.53 J2.54 J2.55 J2.56 J3.51 J3.52 J3.53 J3.54 J3.55 J3.56 J4.51 J4.52 J4.53 J4.54 J4.55 J4.56 J5.51 J5.52 J5.53 J5.54 J5.55 J5.56 J8.97 J8.98 J9.7 J9.19 J9.28 J9.29 J10.4 J10.10 J10.11 J11.8 J11.10 S1.4 S1.5 S1.NC U1.53 U1.55 U1.125 U3.AB5 U3.B22 U3.C19 U3.D1 U3.D10 U3.D12 U3.D13 U3.E8 U3.E10 U3.E12 U3.E14 U3.F8 U3.F9 U3.F10 U3.F12 U3.F13 U3.F14 U3.F15 U3.G8 U3.G9 U3.G11 U3.G13 U3.H5 U3.H6 U3.H10 U3.H11 U3.H12 U3.H13 U3.H14 U3.M7 U3.M8 U3.N22 U3.P7 U3.P21 U3.T5 U3.T10 U3.T12 U3.T20 U3.U8 U3.U10 U3.U12 U3.W6 U3.W15 U3.Y5 U3.Y6 U3.Y16 U3.Y20 U7.40 U9.8 U10.8 U10.9 U10.10 U10.11 U10.12 U10.26 U10.33 U11.8 U11.19 U11.24 U11.27 U11.28 U12.1 U12.11

## Polygon pours and split planes (outlines as drawn)
5.0V on Top Layer, Top (solid, pour order 44): 4962.5,2375 4975,2362.5 4975,2275 5025,2275 5025,2362.5 5037.5,2375 5037.5,2481.25 5112.5,2481.25 5112.5,2543.75 4887.5,2543.75 4887.5,2481.25 4962.5,2481.25
GND on Top Layer, Top (solid, pour order 42): 5212.5,2481.25 5287.5,2481.25 5287.5,3475 5450,3475 5450,3575 5337.5,3575 5287.5,3625 5287.5,3737.5 5237.5,3737.5 5237.5,3600 5212.5,3575 5212.5,3037.5 5087.5,3037.5 5087.5,3137.5 5062.5,3137.5 5062.5,3062.5 5068.75,3056.25 5068.75,3043.75 5062.5,3037.5 5062.5,3012.5 5112.5,3012.5 5112.5,2912.5 5137.5,2912.5 5137.5,2962.5 5262.5,2962.5 5262.5,2687.5 5212.5,2687.5
NET00072 on Top Layer, Top (solid, pour order 40): 5300,3637.5 5350,3637.5 5350,3825 5250,3825 5250,3912.5 5100,3912.5 5100,3762.5 5300,3762.5
GND on Top Layer, Top (solid, pour order 38): 4937.5,3262.5 4912.5,3262.5 4912.5,3575 4812.5,3575 4762.5,3625 4762.5,3737.5 4712.5,3737.5 4712.5,3575 4812.5,3475 4812.5,3312.5 4862.5,3262.5 4862.5,3037.5 4712.5,3037.5 4712.5,2481.25 4787.5,2481.25 4787.5,2687.5 4737.5,2687.5 4737.5,2962.5 4812.5,2962.5 4812.5,2912.5 4887.5,2912.5 4887.5,2962.5 4937.5,2962.5
NET00071 on Top Layer, Top (solid, pour order 36): 4775,3637.5 4825,3637.5 4825,3825 4725,3825 4725,3912.5 4575,3912.5 4575,3762.5 4775,3762.5
NET00005 on Top Layer, Top (solid, pour order 34): 5162.5,3062.5 5187.5,3062.5 5187.5,3587.5 5225,3625 5225,3737.5 5175,3737.5 5075,3637.5 5075,3375 5112.5,3337.5 5112.5,3262.5 5062.5,3262.5 5062.5,3162.5 5112.5,3162.5 5112.5,3062.5
NET00013 on Top Layer, Top (solid, pour order 32): 5525,3025 5725,3025 5725,3175 5575,3175 5575,3087.5 5475,3087.5 5475,2637.5 5525,2637.5
5.0V on Top Layer, Top (solid, pour order 30): 5387.5,2875 5437.5,2875 5437.5,3012.5 5387.5,3012.5
3.3V on Top Layer, Top (solid, pour order 28): 4737.5,3850 4862.5,3850 4862.5,3950 4737.5,3950
NET00004 on Top Layer, Top (solid, pour order 26): 4712.5,3062.5 4837.5,3062.5 4837.5,3262.5 4787.5,3262.5 4787.5,3475 4700,3562.5 4700,3737.5 4650,3737.5 4550,3637.5 4550,3475 4712.5,3475
5.0V on Top Layer, Top (solid, pour order 24): 5187.5,2481.25 5187.5,2937.5 5162.5,2937.5 5162.5,2887.5 5112.5,2887.5 5112.5,2812.5 5118.75,2806.25 5118.75,2793.75 5112.5,2787.5 5112.5,2712.5 5118.75,2706.25 5118.75,2693.75 5112.5,2687.5 5112.5,2481.25
NET00003 on Top Layer, Top (solid, pour order 22): 4962.5,3062.5 4987.5,3062.5 4987.5,3337.5 5012.5,3362.5 5012.5,3825 4937.5,3825 4937.5,3275 4962.5,3275
5.0V on Top Layer, Top (solid, pour order 20): 4887.5,2481.25 4887.5,2887.5 4812.5,2887.5 4812.5,2812.5 4818.75,2806.25 4818.75,2793.75 4812.5,2787.5 4812.5,2712.5 4818.75,2706.25 4818.75,2693.75 4812.5,2687.5 4812.5,2481.25
GND on Top Layer, Top (solid, pour order 18): 5562.5,2875 5612.5,2875 5612.5,3012.5 5562.5,3012.5
1.2V on Top Layer, Top (solid, pour order 16): 5262.5,3850 5387.5,3850 5387.5,3950 5262.5,3950
1.8V on Top Layer, Top (solid, pour order 14): 4912.5,3850 5037.5,3850 5037.5,3950 4912.5,3950
GND on Top Layer, Top (solid, pour order 12): 5012.5,3075 4975,3037.5 4962.5,3037.5 4962.5,2912.5 4975,2912.5 5012.5,2875 5012.5,2575 5037.5,2575 5037.5,2887.5 5025,2887.5 4987.5,2925 4987.5,2962.5 5037.5,2962.5 5037.5,2987.5 4987.5,2987.5 4987.5,3025 5025,3062.5 5037.5,3062.5 5037.5,3325 5012.5,3325
3.3V on Top Layer, Top (solid, pour order 10): 4962.5,2575 4987.5,2575 4987.5,2837.5 4962.5,2837.5
2.5V on Top Layer, Top (solid, pour order 8): 5475,3112.5 5562.5,3112.5 5562.5,3212.5 5475,3212.5
THERMAL_SW2 on Top Layer, Top (solid, pour order 6): 5212.5,2712.5 5237.5,2712.5 5237.5,2937.5 5212.5,2937.5
THERMAL_SW1 on Top Layer, Top (solid, pour order 4): 4912.5,2712.5 4937.5,2712.5 4937.5,2887.5 4931.25,2893.75 4931.25,2906.25 4937.5,2912.5 4937.5,2937.5 4912.5,2937.5
GND on Top Layer, Top (solid, pour order 2): 4912.5,2637.5 4937.5,2637.5 4937.5,2687.5 4912.5,2687.5
GND on Top Layer, Top (solid, pour order 0): 5062.5,2637.5 5087.5,2637.5 5087.5,2687.5 5062.5,2687.5
NET00072 on Bottom Layer, Bottom (solid, pour order 68): 5300,3637.5 5350,3637.5 5350,3825 5250,3825 5250,3912.5 5100,3912.5 5100,3762.5 5300,3762.5
NET00071 on Bottom Layer, Bottom (solid, pour order 66): 4775,3637.5 4825,3637.5 4825,3825 4725,3825 4725,3912.5 4575,3912.5 4575,3762.5 4775,3762.5
NET00005 on Bottom Layer, Bottom (solid, pour order 64): 5162.5,3062.5 5187.5,3062.5 5187.5,3587.5 5225,3625 5225,3737.5 5175,3737.5 5075,3637.5 5075,3375 5112.5,3337.5 5112.5,3262.5 5062.5,3262.5 5062.5,3162.5 5112.5,3162.5 5112.5,3062.5
NET00013 on Bottom Layer, Bottom (solid, pour order 62): 5525,3025 5725,3025 5725,3175 5575,3175 5575,3087.5 5475,3087.5 5475,2912.5 5525,2912.5
5.0V on Bottom Layer, Bottom (solid, pour order 60): 5387.5,2912.5 5437.5,2912.5 5437.5,3012.5 5387.5,3012.5
3.3V on Bottom Layer, Bottom (solid, pour order 58): 4737.5,3850 4862.5,3850 4862.5,3950 4737.5,3950
NET00004 on Bottom Layer, Bottom (solid, pour order 56): 4712.5,3062.5 4837.5,3062.5 4837.5,3262.5 4787.5,3262.5 4787.5,3475 4700,3562.5 4700,3737.5 4650,3737.5 4550,3637.5 4550,3475 4712.5,3475
NET00003 on Bottom Layer, Bottom (solid, pour order 54): 4962.5,3087.5 4987.5,3087.5 4987.5,3600 5050,3600 5050,3750 4900,3750 4900,3600 4925,3600 4925,3275 4962.5,3275
GND on Bottom Layer, Bottom (solid, pour order 52): 5562.5,2912.5 5612.5,2912.5 5612.5,3012.5 5562.5,3012.5
1.2V on Bottom Layer, Bottom (solid, pour order 50): 5262.5,3850 5387.5,3850 5387.5,3950 5262.5,3950
1.8V on Bottom Layer, Bottom (solid, pour order 48): 4912.5,3850 5037.5,3850 5037.5,3950 4912.5,3950
2.5V on Bottom Layer, Bottom (solid, pour order 46): 5475,3112.5 5562.5,3112.5 5562.5,3212.5 5475,3212.5
V_BANK3 on Internal Plane 2, Vcc 3.3V (split plane): 7575.73,4901.57 7575.96,4900.42 7576.61,4899.45 7577.59,4898.79 7578.74,4898.56 7674.15,4898.56 7674.15,4628.99 7598.43,4628.99 7597.27,4628.77 7596.3,4628.11 7595.64,4627.14 7595.41,4625.98 7595.41,4547.24 7595.64,4546.09 7596.3,4545.12 7597.27,4544.46 7598.43,4544.23 7733.21,4544.23 7733.21,3940.02 7660.49,3940.02 7660.49,4114.17 7660.26,4115.33 7659.61,4116.3 7658.63,4116.95 7657.48,4117.18 7503.01,4117.18 7503.01,4232.28 7502.78,4233.44 7502.13,4234.41 7501.15,4235.06 7500,4235.29 7365.22,4235.29 7365.22,4507.87 7364.99,4509.03 7364.33,4510 7363.36,4510.66 7362.2,4510.88 7325.85,4510.88 7325.85,4583.6 7460.63,4583.6 7461.78,4583.83 7462.76,4584.49 7463.41,4585.46 7463.64,4586.61 7463.64,4783.46 7463.41,4784.62 7462.76,4785.59 7461.78,4786.25 7460.63,4786.48 7404.59,4786.48 7404.59,4859.19 7460.63,4859.19 7461.78,4859.42 7462.76,4860.08 7463.41,4861.05 7463.64,4862.2 7463.64,4937.93 7575.73,4937.93
1.2V on Internal Plane 2, Vcc 3.3V (split plane): 7260.77,4133.86 7261,4132.71 7261.65,4131.73 7262.63,4131.08 7263.78,4130.85 7339.51,4130.85 7339.51,3821.91 5239.23,3821.91 5239.23,3953.68 6948.82,3953.68 6949.97,3953.91 6950.95,3954.56 6951.6,3955.54 6951.83,3956.69 6951.83,4130.85 7027.56,4130.85 7028.71,4131.08 7029.69,4131.73 7030.34,4132.71 7030.57,4133.86 7030.57,4741.08 7260.77,4741.08
5.0V on Internal Plane 2, Vcc 3.3V (split plane): 5221.99,2328.01 4778.01,2328.01 4778.01,2921.99 4896.99,2921.99 4896.99,2475 4897.22,2473.85 4897.87,2472.87 4898.85,2472.22 4900,2471.99 5100,2471.99 5101.15,2472.22 5102.13,2472.87 5102.78,2473.85 5103.01,2475 5103.01,2921.99 5221.99,2921.99
3.3V on Internal Plane 2, Vcc 3.3V (split plane): 9000,2081.5 2700.79,2081.5 2700.79,6018.5 9000,6018.5
GND on Internal Plane 1, Gnd (split plane): 9000,2081.5 2700.79,2081.5 2700.79,6018.5 9000,6018.5

## Keep-outs
Keep-Out Layer, Board:
  lines w5: 2700.79,2081.5 9000,2081.5 9000,6018.5 2700.79,6018.5 2700.79,2081.5
  lines w10: 2700.79,2081.5 9000,2081.5 9000,6018.5 2700.79,6018.5 2700.79,2081.5

## Other copper
Internal Plane 2, Vcc 3.3V (plane layer: these items are gaps in the copper):
  lines w5.91: 4775,2325 4775,2925 4900,2925 4900,2475 5100,2475 5100,2925 5225,2925 5225,2325 4775,2325 ; 5236.22,3818.9 5236.22,3956.69 6948.82,3956.69 6948.82,4133.86 7027.56,4133.86 7027.56,4744.09 7263.78,4744.09 7263.78,4133.86 7342.52,4133.86 7342.52,3818.9 5236.22,3818.9 ; 7322.83,4507.87 7322.83,4586.61 7460.63,4586.61 7460.63,4783.46 7401.57,4783.46 7401.57,4862.2 7460.63,4862.2 7460.63,4940.94 7578.74,4940.94 7578.74,4901.57 7677.17,4901.57 7677.17,4625.98 7598.43,4625.98 7598.43,4547.24 7736.22,4547.24 7736.22,3937.01 7657.48,3937.01 7657.48,4114.17 7500,4114.17 7500,4232.28 7362.2,4232.28 7362.2,4507.87 7322.83,4507.87

## Silkscreen, mask and mechanical layers (free items; w line width, h text height)
Mechanical 1, Top Assy:
  lines w5.91: 5962.5,2200 5962.5,2106.25 6056.25,2106.25
  lines w10: 5962.5,5900 5962.5,5993.75 6056.25,5993.75
Mechanical 3, Title:
  lines w10: 100,300 10700,300 ; 100,1433.33 300,1433.33 ; 100,2566.66 300,2566.66 ; 100,3699.99 300,3699.99 ; 100,4833.32 300,4833.32 ; 100,5966.65 300,5966.65 ; 100,7100 10700,7100 ; 300,100 300,7300 ; 1320,100 1320,300 ; 1320,7100 1320,7300 ; 2340,100 2340,300 ; 2340,7100 2340,7300 ; 3360,100 3360,300 ; 3360,7100 3360,7300 ; 4380,100 4380,300 ; 4380,7100 4380,7300 ; 5400,100 5400,300 ; 5400,7100 5400,7300 ; 6100,300 6100,1200 10500,1200 ; 6100,600 10500,600 ; 6420,100 6420,300 ; 6420,7100 6420,7300 ; 7440,100 7440,300 ; 7497.5,7100 7497.5,7300 ; 8441.25,7100 8441.25,7300 ; 8460,100 8460,300 ; 8700,300 8700,1200 ; 8700,900 10500,900 ; 9100,600 9100,1200 ; 9480,100 9480,300 ; 9480,7100 9480,7300 ; 10500,100 10500,7300 ; 10500,1433.33 10700,1433.33 ; 10500,2566.66 10700,2566.66 ; 10500,3699.99 10700,3699.99 ; 10500,4833.32 10700,4833.32 ; 10500,5966.65 10700,5966.65 ; 100,100 10700,100 10700,7300 100,7300 100,100
  text "7" at 7951.25,7138.75 h62.5
  text "0" at 767.5,7132.5 h62.5
  text "1" at 1787.5,7132.5 h62.5
  text "2" at 2807.5,7132.5 h62.5
  text "3" at 3827.5,7132.5 h62.5
  text "4" at 4847.5,7132.5 h62.5
  text "5" at 5867.5,7132.5 h62.5
  text "6" at 6887.5,7132.5 h62.5
  text "8" at 8927.5,7132.5 h62.5
  text "9" at 9947.5,7132.5 h62.5
  text "A" at 160.62,6465.15 h62.5
  text "A" at 10560.62,6465.15 h62.5
  text "B" at 155.94,5331.82 h62.5
  text "B" at 10555.94,5331.82 h62.5
  text "C" at 155.94,4198.49 h62.5
  text "C" at 10555.94,4198.49 h62.5
  text "D" at 155.94,3065.16 h62.5
  text "D" at 10555.94,3065.16 h62.5
  text "E" at 159.06,1931.83 h62.5
  text "E" at 10559.06,1931.83 h62.5
  text "DES" at 8795,1000 h62.5
  text "25.05.2012   WAL" at 9200,1000 h62.5
  text "FPGA Rack" at 6200,872.05 h123.03
  text "F" at 160.62,798.5 h62.5
  text "F" at 10560.62,798.5 h62.5
  text "REV" at 8798.12,700 h62.5
  text "V2.0" at 9200,700 h62.5
  text "...\FPGA-EBS\FPGA_EBS_V2.0" at 8800,450 h62.5
  text "HAUTE ECOLE VALAISANNE - ECOLE D'INGENIEURS" at 6200,400 h62.5
  text "0" at 767.5,132.5 h62.5
  text "1" at 1787.5,132.5 h62.5
  text "2" at 2807.5,132.5 h62.5
  text "3" at 3827.5,132.5 h62.5
  text "4" at 4847.5,132.5 h62.5
  text "5" at 5867.5,132.5 h62.5
  text "6" at 6887.5,132.5 h62.5
  text "7" at 7907.5,132.5 h62.5
  text "8" at 8927.5,132.5 h62.5
  text "9" at 9947.5,132.5 h62.5
Mechanical 4, mecanical:
  lines w5: 6018.9,5703.54 8381.1,5703.54 ; 6215.75,2081.5 6215.75,6018.5 ; 7200,2081.5 7200,6018.5 ; 8184.25,2081.5 8184.25,6018.5
  lines w5.91: 6018.9,2396.46 8381.1,2396.46 ; 8550,2500 8550,5600 ; 2700,1400 2700,1900 3200,1900 3200,1400 2700,1400
  lines w10: 2700.79,2199.61 9000,2199.61 ; 2700.79,4050 9000,4050 ; 2700.79,5900.39 9000,5900.39 ; 6018.9,2081.5 6018.9,6018.5 ; 8381.1,2081.5 8381.1,6018.5
Mechanical 5, Dimensions:
  lines w20: 2687.5,1850 6000,1850 ; 6000,1762.5 9000,1762.5
  text "Motherboard zone" at 3650,1887.5 h62.5
  text "Mezzanine zone" at 7200,1800 h62.5
Mechanical 6, Inspcriptions:
  lines w10: 5696.85,2220.47 5720.47,2244.09 ; 5696.85,5527.56 5720.47,5551.18 ; 5708.66,2232.28 5708.66,2267.72 ; 5708.66,5539.37 5708.66,5574.8 ; 8078.74,2771.65 8102.36,2795.28 ; 8078.74,4346.46 8102.36,4370.08 ; 8090.55,2783.46 8090.55,2818.9 ; 8090.55,4358.27 8090.55,4393.7 ; 3799.21,4192.91 3799.21,4566.93 3818.9,4586.61 4370.08,4586.61 4389.76,4566.93 4389.76,4192.91 4370.08,4173.23 3818.9,4173.23 3799.21,4192.91
  text "Y2" at 7887.69,5274.46 h37.5
  text "Y1" at 8025.49,5274.46 h37.5
  text "CLK_25M" at 4094.49,5195.72 h37.5
  text "W3" at 7876.44,5195.72 h37.5
  text "W1" at 8014.24,5195.72 h37.5
  text "V2" at 7887.69,5116.98 h37.5
  text "V1" at 8025.49,5116.98 h37.5
  text "U4" at 7880.19,5038.24 h37.5
  text "V3" at 8025.49,5038.24 h37.5
  text "CLK_106_25M" at 5505.88,5034.5 h37.5
  text "U3" at 7880.19,4959.5 h37.5
  text "U1" at 8017.99,4959.5 h37.5
  text "T2" at 7891.44,4880.76 h37.5
  text "T1" at 8029.24,4880.76 h37.5
  text "T4" at 7891.44,4802.02 h37.5
  text "T3" at 8029.24,4802.02 h37.5
  text "R3" at 7882.07,4723.28 h37.5
  text "R1" at 8019.86,4723.28 h37.5
  text "R4" at 7882.07,4644.54 h37.5
  text "P4" at 8019.86,4644.54 h37.5
  text "P8" at 7882.07,4565.8 h37.5
  text "P2" at 8019.86,4565.8 h37.5
  text "P1" at 7882.07,4487.06 h37.5
  text "P6" at 8019.86,4487.06 h37.5
  text "RS232" at 3940.19,4467.11 h56.88
  text "P5" at 7882.07,4408.32 h37.5
  text "P3" at 8019.86,4408.32 h37.5
  text "TXD0" at 3818.9,4368.95 h37.5
  text "J11-3" at 3992.11,4368.95 h37.5
  text "P18" at 4242.2,4368.95 h37.5
  text "3.3" at 7865.19,4329.58 h37.5
  text "RXD0" at 3818.9,4309.89 h37.5
  text "J11-5" at 3992.11,4309.89 h37.5
  text "P19" at 4242.2,4309.89 h37.5
  text "TXD1" at 3818.9,4250.84 h37.5
  text "J1-2" at 4010.86,4250.84 h37.5
  text "P17" at 4242.2,4250.84 h37.5
  text "RXD1" at 3818.9,4191.78 h37.5
  text "J1-4" at 4010.86,4191.78 h37.5
  text "N19" at 4240.33,4191.78 h37.5
  text "H" at 4921.26,4133.86 h666.67
  text "3.3V" at 4579.5,3959.5 h37.5
  text "1.8V" at 4904.5,3959.5 h37.5
  text "1.2V" at 5104.5,3959.5 h37.5
  text "3.3V" at 7660.19,3774.16 h37.5 r90
  text "2.5V" at 7817.67,3774.16 h37.5 r90
  text "BANK3" at 7738.93,3710.41 h37.5 r90
  text "G7" at 7882.07,3699.66 h37.5
  text "F3" at 8025.49,3699.66 h37.5
  text "G6" at 7882.07,3620.92 h37.5
  text "F5" at 8025.49,3620.92 h37.5
  text "FPGA_Rack_v1_0.pcb" at 6102.36,3589 h56.88
  text "G3" at 7882.07,3542.18 h37.5
  text "G1" at 8019.86,3542.18 h37.5
  text "25.05.2012  WAL" at 6102.36,3464.57 h56.88
  text "F2" at 7887.69,3463.44 h37.5
  text "F1" at 8025.49,3463.44 h37.5
  text "JTAG_USB" at 3146.26,3461.67 h37.5
  text "E5" at 7885.82,3384.7 h37.5
  text "E6" at 8023.61,3384.7 h37.5
  text "D5" at 7882.07,3305.96 h37.5
  text "E4" at 8023.61,3305.96 h37.5
  text "P20" at 3225,3284.5 h37.5
  text "E3" at 7885.82,3227.22 h37.5
  text "E1" at 8023.61,3227.22 h37.5
  text "2.5V" at 5579.5,3209.5 h37.5
  text "P22" at 3225,3184.5 h37.5
  text "D3" at 7882.07,3148.48 h37.5
  text "C4" at 8019.86,3148.48 h37.5
  text "N16" at 3225,3084.5 h37.5
  text "D2" at 7882.07,3069.74 h37.5
  text "F7" at 8025.49,3069.74 h37.5
  text "C3" at 7882.07,2991 h37.5
  text "C1" at 8019.86,2991 h37.5
  text "M19" at 3225,2984.5 h37.5
  text "B2" at 7882.07,2912.26 h37.5
  text "B1" at 8019.86,2912.26 h37.5
  text "A2" at 7887.69,2833.52 h37.5
  text "B3" at 8019.86,2833.52 h37.5
  text "M18" at 3503.94,2790.21 h37.5
  text "3.3" at 7865.19,2754.78 h37.5
  text "SOFT" at 3754.19,2725 h37.5
  text "FPGA" at 4283.24,2725 h37.5
  text "M17" at 3503.94,2719.34 h37.5
  text "M16" at 3503.94,2648.48 h37.5
  text "RESET" at 3754.19,2643.25 h37.5
  text "DONE" at 4283.24,2643.25 h37.5
  text "L17" at 3503.94,2577.61 h37.5
  text "L15" at 3789.81,2559.5 h37.5
  text "Y22" at 4307.62,2559.5 h37.5
  text "HARD" at 3325,2400 h37.5
  text "USB_5V" at 4565.88,2359.5 h37.5
  text "VME_5V" at 5175,2359.5 h37.5
  text "RESET" at 3325,2318.25 h37.5
  text "MEZ_5V" at 5175,2259.5 h37.5
  text "AA1" at 3325,2234.5 h37.5

## Dimensions
2700.79,6078.5 to 9000,6078.5 on Mechanical 5, Dimensions
9060,2081.5 to 9060,6018.5 on Mechanical 5, Dimensions